# Altium PCB sensorbox.PcbDoc (part 2 of 2)
Units mil, origin at the board's own origin, x right, y up, seen from the top; angles counter-clockwise.
Board outline 2706 x 4143.13 mil, 2 copper layers (Top Layer, Bottom Layer), stack 61.855 mil thick; 118 components, 125 nets, 651 pads, 573 vias.
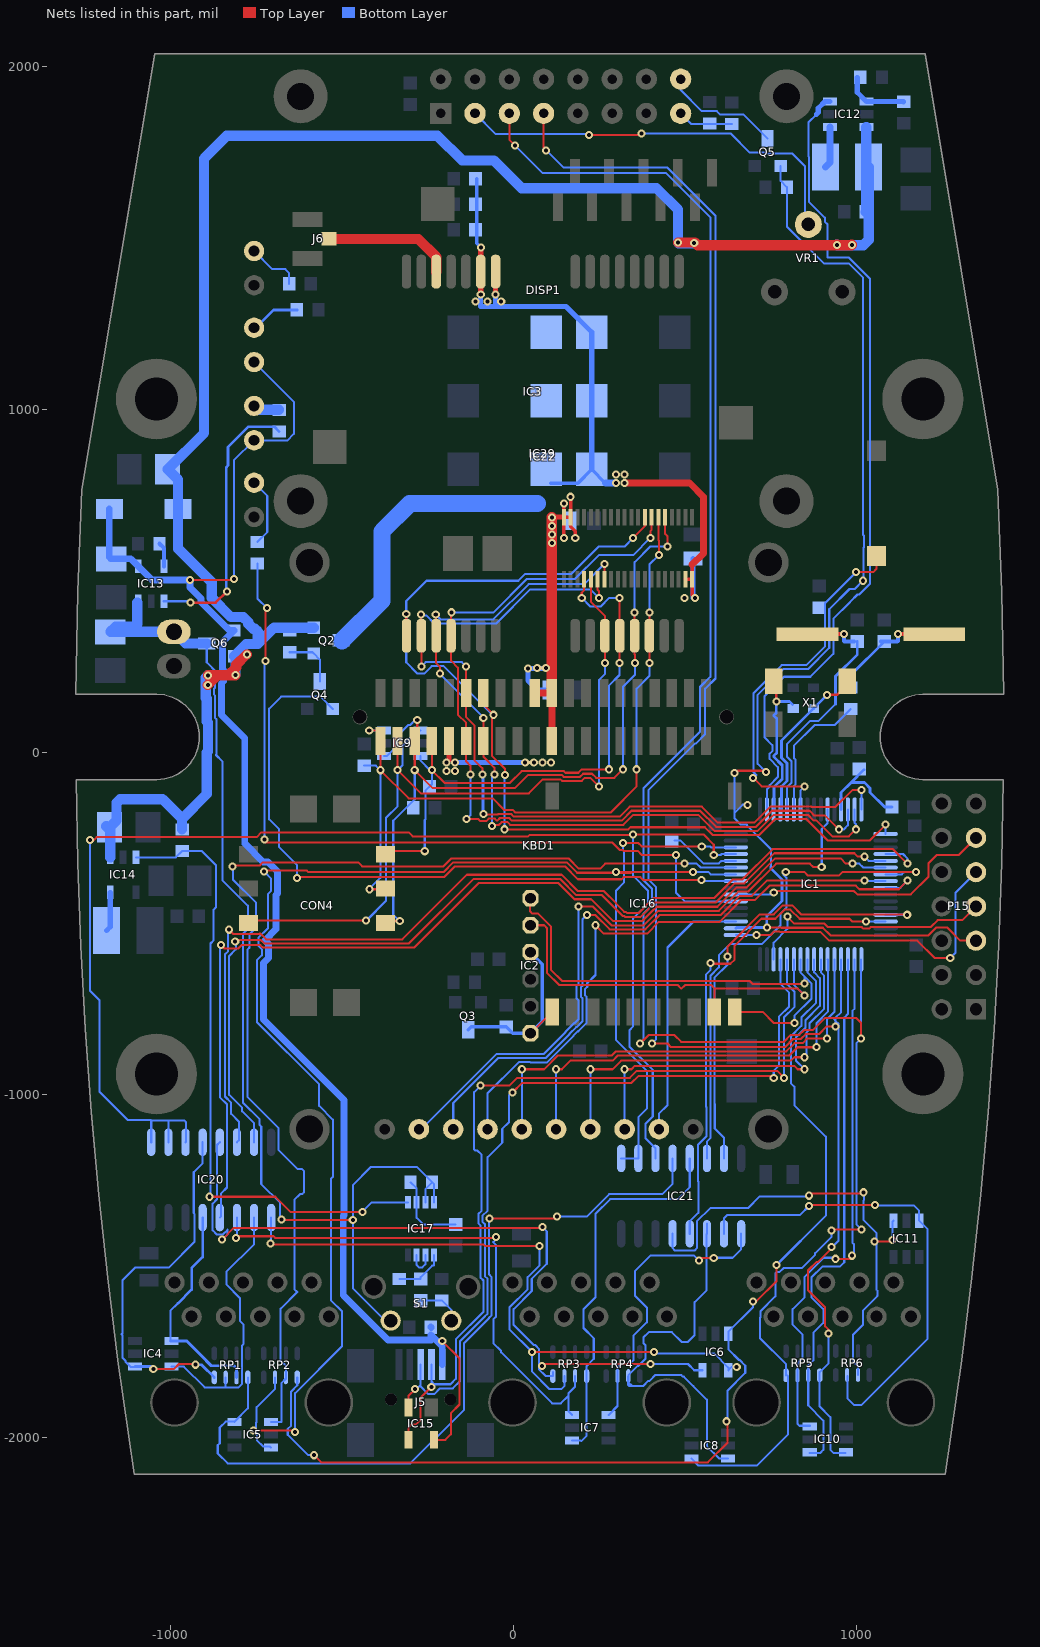
[diagram p2: the nets of this part, all layers, seen from the top]

## Via types
v1: diameter 23.62, hole 11.81, Top Layer to Bottom Layer, tented both sides, 573 vias

## Nets (pads, with @x,y where several pads share a name; then routed paths per layer and width w, separated by ;. In a path a pad name is that pad's centre, name@x,y a point inside that pad or via, vN(x,y) a via of type N, cw(c..) or ccw(c..) an arc to the next point about the centre after c; other vN are vias at no path point) (continued)
GSM_PWR: C12.1 C21.1 C22.1 C23.1 C24.1 C25.2 C26.1 C27.1 C28.1 C29.1 C35.1 C36.1 IC3.1 IC3.2 IC3.39 IC3.40 IC22.10 IC22.19 IC22.21 IC22.22 IC29.24 IC29.25 Q2.3 | length 4479.8
  Top Layer w10: v1(147.99,625) IC3.1@147.99,685.55 ; v1(147.99,725) IC3.1@147.99,685.55 ; v1(167.68,745) IC3.2@167.68,685.55 ; v1@181,619 v1(181,625) 181,644 167.68,657.32 IC3.2@167.68,685.55 ; IC3.39@502.32,504.45 IC3.40@522.01,504.45 ; 522.01,547.01 IC3.40@522.01,504.45 ; v1(530,450) 522.01,457.99 IC3.40@522.01,504.45 ; IC3.1@147.99,685.55 IC3.2@167.68,685.55
  Top Layer w15: v1(-195,-30) -187.32,-22.32 IC22.10@-187.32,32.72 ; v1(-94.72,1335) IC29.25@-94.72,1401.85 v1@-94.72,1472.2 ; v1(-51.42,1335) IC29.24@-51.42,1401.85 ; v1@112.68,685.55 IC3.1@147.99,685.55
  Top Layer w20: IC22.19@62.68,172.48 IC22.21@112.68,172.48 IC22.22@112.68,32.72 ; v1(325,785) 515,785 555,745 555,580 522.01,547.01
  Top Layer w30: IC22.21@112.68,172.48 v1(112.68,610) v1(112.68,635) v1(112.68,660) v1(112.68,685)
  Bottom Layer w10: C29.1@-106.73,1673.23 -106.73,1598.43 -106.73,1523.62 -106.73,1484.69 v1(-94.49,1472.44) ; C12.1@110,785 188.94,785 C23.1@228.94,825 C23.1@268.94,785 ; v1@112.68,685.55 C26.1@164.9,685.55
  Bottom Layer w15: v1(-170,-30) v1(35,-30) ; v1(-94.72,1335) -95,1325 -95,1300 -50,1300 ; v1(-51.42,1335) -51.42,1301.42 -50,1300 ; v1(95,245) 94.09,244.09 v1(43.31,244.09) 43.31,208.66 70.87,181.1 C27.1@106.73,181.1 ; C23.1@228.94,825 C21.1@228.94,1025 C28.1@228.94,1225 153.94,1300 -50,1300 ; v1@525,450 C25.2@525,564.57
  Bottom Layer w20: C23.1@268.94,785 v1(300,785)
  Bottom Layer w50: Q2.3@-499.82,324.84 -382.81,441.85 -382.81,644.19 -302,725 70,725
  other v1: -195,-55 -170,-55 60,-30 85,-30 110,-30 70,245 500,450 300,810 325,810 -110,1315 -75,1315 -35,1315
GSM_PWR_ON: IC1.57 Q4.1 | length 2060
  Top Layer w6: v1(-631,-367) -628,-364 -200.43,-364 -170.11,-333.68 151.28,-333.68 188.41,-370.81 315.97,-370.81 322.35,-364.43 370.72,-364.43 379.29,-373 v1(549,-373)
  Bottom Layer w6: v1(-631,-367) -631,-329 -683,-277 -683,-225 -712,-196 -712,127 -677,162 -562,162 Q4.1@-526,126 ; v1(549,-373) 551.98,-375.98 IC1.57@649.45,-375.98
GSM_UART_CTS: IC1.14 IC3.14 IC22.12 IC29.4 | length 2614
  Top Layer w6: v1(-180,408) -181.34,406.66 IC29.4@-181.34,339.84 -181.34,266.34 -161.28,246.28 -161.28,109.31 -137.32,85.35 IC22.12@-137.32,32.72 -137.32,-27.32 -125,-39.65 v1(-125,-65) ; v1(-136,-195) -101.62,-195 -95.62,-201 -78.38,-201 -71.57,-194.19 -53.38,-194.19 -47.66,-199.91 -46.31,-199.91 -38.59,-192.19 -11.41,-192.19 -3.69,-199.91 316.06,-199.91 344.97,-171 545.03,-171 591.81,-217.78 708.19,-217.78 754.97,-171 864.94,-171 878.94,-185 910,-185 v1(950,-225) ; v1(400,625) 400,645 403.9,648.9 IC3.14@403.9,685.55
  Bottom Layer w6: v1(-180,408) -57,408 40,505 180,505 250,575 350,575 v1(400,625) ; v1(-136,-195) -125,-184 v1(-125,-65) ; v1(950,-225) 965,-225 976.22,-213.78 IC1.14@976.22,-167.32
GSM_UART_RTS: IC1.15 IC3.27 IC22.14 IC29.3 | length 2521.2
  Top Layer w6: v1(-226,401) -224.65,399.65 IC29.3@-224.65,339.84 -224.65,259.65 -213,248 v1(-213,230) ; IC22.14@-90,30.04 IC22.14@-87.32,32.72 ; v1(-87.32,100) IC22.14@-87.32,32.72 ; v1(-62,-215) -64,-213 -62.91,-211.91 -41.34,-211.91 -33.62,-204.19 -16.38,-204.19 -8.66,-211.91 321.03,-211.91 349.94,-183 540.06,-183 586.84,-229.78 713.16,-229.78 759.94,-183 859.97,-183 876.97,-200 885,-200 930.81,-245.81 979.19,-245.81 v1(1000,-225) ; v1(-55,-65) -55,-45 -87.32,-12.68 IC22.14@-87.32,32.72 ; IC3.27@266.1,504.45 v1(266.1,548.9)
  Bottom Layer w6: v1(-226,401) -212.19,387.19 -57.81,387.19 45,490 207.2,490 v1(266.1,548.9) ; v1(-213,230) -213,227 -87.32,101.32 v1(-87.32,100) ; v1(-62,-215) -62,-72 v1(-55,-65) ; IC1.15@995.91,-167.32 995.91,-205.91 1000,-210 v1(1000,-225)
GSM_UART_RX: IC1.16 IC3.26 IC22.11 IC29.2 | length 2731.7
  Top Layer w6: v1(-269,401) -269,340.89 IC29.2@-267.95,339.84 v1(-267.95,250) ; v1(-137.32,250) IC22.11@-137.32,172.48 -137.32,102.32 -113.36,78.36 -113.36,-23.36 -90,-46.72 v1(-90,-65) ; v1(-87,-180.19) -87,-184 -81.4,-184 -79.59,-182.19 -45.56,-182.19 -43.56,-180.19 -6.44,-180.19 1.28,-187.91 311.09,-187.91 340,-159 550,-159 596.78,-205.78 703.22,-205.78 750,-159 869.91,-159 870.91,-160 940,-160 989.41,-110.59 v1(1015.59,-110.59) ; IC3.26@246.42,504.45 246.42,473.58 250,470 v1(250,450)
  Bottom Layer w6: v1(-269,401) -269,399 -253.43,399 -229.62,375.19 -49.81,375.19 50,475 225,475 v1(250,450) ; v1(-267.95,250) -255.14,262.81 -150.13,262.81 v1(-137.32,250) ; v1@-90,-175 v1(-90,-65) -87,-68 v1(-87,-180.19) ; IC1.16@1015.59,-167.32 v1(1015.59,-110.59)
GSM_UART_TX: IC1.17 IC3.13 IC22.13 IC29.1 | length 3036.9
  Top Layer w6: v1(-312,403) -312,340.58 IC29.1@-311.26,339.84 ; IC22.13@-87.32,172.48 -87.32,139.32 v1(-57,109) -61.28,104.72 -61.28,-11.37 -24,-48.65 v1(-24,-67) ; v1(-25,-225) 335.57,-225 341.57,-219 559.09,-219 581.87,-241.78 718.13,-241.78 764.91,-195 855,-195 917.81,-257.81 1040.1,-257.81 v1(1086.46,-211.46) ; v1(350,625) 384.21,659.21 IC3.13@384.21,685.55
  Bottom Layer w6: v1(-57,109) -61,109 -202.81,250.81 -237.71,250.81 -259.33,229.19 -279.19,229.19 -312,262 v1(-312,403) -312,441 -253,500 15,500 35,520 170,520 250,600 325,600 v1(350,625) ; v1(-25,-225) -25,-70 -22,-67 v1(-24,-67) ; IC1.17@1086.46,-238.19 v1(1086.46,-211.46)
I2C1_SCL/USART1_TX_RMP: IC1.58 IC5.3 RP2.7 | length 3688.3
  Top Layer w6: v1(-758,-1979) -641,-1979 v1(-637,-1983) ; v1(-727,-348) -729,-348 -732,-345 -603,-345 -598,-350 -203.4,-350 -175.08,-321.68 156.25,-321.68 186.38,-351.81 344.19,-351.81 346,-350 ; v1(300,-350) 346,-350 ; v1(525,-350) 346,-350
  Bottom Layer w6: v1(-758,-1979) -748,-1979 -748,-2007 -730,-2025 -710.25,-2025 IC5.3@-706.85,-2028.4 ; -746,-1979 -751,-1974 -751,-1957.03 -748.52,-1954.55 -748.52,-1910.52 -694.75,-1856.75 RP2.7@-694.75,-1824 ; v1(-727,-348) -706.19,-368.81 -706.19,-404.62 -715,-413.43 -715,-512.9 -743.5,-541.4 -743.5,-565.07 -733.19,-575.38 -733.19,-592.62 -747.81,-607.24 -747.81,-787.29 -566.1,-969 -566.1,-1031.94 -526.24,-1071.81 -526.24,-1239.31 -531.93,-1245 -531.93,-1598.58 -499.47,-1631.04 -499.47,-1733.47 -636,-1870 -636,-1982 v1(-637,-1983) ; v1(525,-350) 570,-350 576.3,-356.3 IC1.58@649.45,-356.3
I2C1_SDA/USART1_RX_RMP: IC1.59 IC5.1 RP2.6 | length 3324.4
  Top Layer w6: v1(-819,-333) -818,-334 -814.62,-330.62 -739.05,-330.62 -730.11,-321.68 -452.06,-321.68 -440.74,-333 -203.37,-333 -180.05,-309.68 161.22,-309.68 191.35,-339.81 253.62,-339.81 268.43,-325 v1(500,-325)
  Bottom Layer w6: v1(-819,-333) -818,-334 -818,-371.6 -750.19,-439.41 -750.19,-512.22 -769.19,-531.22 -769.19,-569.76 -774.81,-575.38 -774.81,-1006.16 -685,-1095.97 -685,-1160.41 -628.97,-1216.44 -615.94,-1216.44 -610.67,-1221.71 -610.67,-1284.29 -615.94,-1289.56 -621.97,-1289.56 -638.53,-1306.12 -638.53,-1566.47 -630,-1575 -678.25,-1623.25 -678.25,-1774.21 -663.25,-1789.21 RP2.6@-663.25,-1824 ; IC5.1@-706.85,-1953.6 -676.4,-1953.6 -676.4,-1840.8 RP2.6@-662.8,-1827.2 ; v1(500,-325) 535,-325 546.61,-336.61 IC1.59@649.45,-336.61
I2C2_SCL/UART3_TX: IC1.29 IC21.15 | length 1293
  Top Layer w6: v1(625,-596.51) 625,-568.03 719.75,-473.28 760.31,-473.28 786.41,-447.19 813.59,-447.19 839.69,-473.28 1148.28,-473.28 v1(1149.41,-474.41)
  Bottom Layer w6: IC21.15@615,-1185 615,-1125 588,-1098 588,-1026.8 587,-1025.8 587,-658 625,-620 v1(625,-596.51) ; IC1.29@1086.46,-474.41 v1(1149.41,-474.41)
I2C2_SDA/UART3_RX: IC1.30 IC21.4 | length 1432.7
  Top Layer w6: v1(575,-615) 577.33,-617.33 633.62,-617.33 645.81,-605.13 645.81,-564.19 724,-486 764.57,-486 791.38,-459.19 808.62,-459.19 835.43,-486 981,-486 989.09,-494.09 v1(1029.53,-494.09)
  Bottom Layer w6: IC21.4@515,-1405 515,-1369 540,-1344 540,-1252.43 539.19,-1251.62 539.19,-1144.81 564,-1120 564,-1036.74 563,-1035.74 563,-648.06 575,-636.06 v1(575,-615) ; v1(1029.53,-494.09) IC1.30@1086.46,-494.09
IRQ1: IC1.41 IC6.6 RP2.5 | length 3187.2
  Top Layer w6: v1(-581,-2051) -560,-2072 567.94,-2072 625,-2014.94 625,-1949 v1(622,-1952) ; v1(700,-1602) 709.49,-1602 768,-1543.49 v1(768,-1496)
  Bottom Layer w6: RP2.5@-630,-1824 -630,-1847.03 -648,-1865.03 -648,-1964.57 -657.81,-1974.38 -657.81,-1991.62 -598.43,-2051 v1(-581,-2051) ; v1(622,-1952) 625,-1949 625,-1862.43 676.92,-1810.51 676.92,-1789.49 660.62,-1773.19 658.62,-1773.19 627.4,-1741.97 IC6.6@627.4,-1696.85 627.4,-1691.17 700,-1618.57 v1(700,-1602) ; v1(768,-1496) 912,-1352 912,-1122.03 820,-1030.03 820,-976 810.81,-966.81 810.81,-885.81 810,-885 810,-829.43 840.81,-798.62 840.81,-774.19 882.81,-732.19 882.81,-667.17 858.11,-642.47 IC1.41@858.11,-604.33
KB_COL_0: IC1.38 KBD1.6 | length 1232.3
  Top Layer w6: v1(125,-925) 141.93,-925 166.93,-900 290,-900 305,-885 805,-885 829.19,-860.81 884.19,-860.81 v1(885,-860)
  Bottom Layer w6: KBD1.6@125,-1100 v1(125,-925) ; v1(885,-860) 885,-790 918.81,-756.19 918.81,-605.98 IC1.38@917.17,-604.33
KB_COL_1: IC1.39 KBD1.7 | length 1127.6
  Top Layer w6: v1(225,-925) 290,-925 315,-900 810,-900 820,-890 v1(850,-890)
  Bottom Layer w6: KBD1.7@225,-1100 v1(225,-925) ; v1(850,-890) 856,-884 856,-817.37 864.81,-808.56 864.81,-790.19 906.81,-748.19 906.81,-651.81 897.48,-642.48 IC1.39@897.48,-604.33
KB_COL_2: IC1.40 KBD1.8 | length 1077.1
  Top Layer w6: v1(325,-925) 345,-925 355,-915 820,-915 830,-925 v1(850,-925)
  Bottom Layer w6: KBD1.8@325,-1100 v1(325,-925) ; KBD1.8@328.74,-1102.36 KBD1.8@330,-1101.1 ; v1(850,-925) 825,-900 825,-831.4 852.81,-803.59 852.81,-782.19 894.81,-740.19 894.81,-659.57 877.8,-642.55 IC1.40@877.8,-604.33
KB_COL_3: IC1.51 KBD1.9 | length 771.2
  Bottom Layer w6: KBD1.9@425,-1100 425,-1055 450,-1030 450,-570 525.91,-494.09 IC1.51@649.45,-494.09
KB_ROW_0: IC1.11 KBD1.2 | length 1918.8
  Top Layer w6: v1(190,-450) 231.4,-450 286.6,-505.2 380.66,-505.2 422.86,-463 600.12,-463 656.12,-407 684.97,-407 766.97,-325 865,-325 875,-335 v1(900,-335)
  Bottom Layer w6: KBD1.2@-275,-1100 -268.4,-1100 -48.59,-880.19 89.81,-880.19 152.19,-817.81 152.19,-816.44 178.44,-790.19 179.81,-790.19 190,-780 190,-723.37 185.19,-718.56 185.19,-681.44 190,-676.63 v1(190,-450) ; v1(900,-335) 900,-223.94 917.17,-206.78 IC1.11@917.17,-167.32
KB_ROW_1: IC1.24 KBD1.3 | length 1820.2
  Top Layer w6: v1(215,-475) 239.43,-475 281.63,-517.2 385.63,-517.2 427.83,-475 605.09,-475 661.09,-419 696,-419 740,-375 v1(1025,-375)
  Bottom Layer w6: KBD1.3@-175,-1100 -175,-1023.57 -43.62,-892.19 94.78,-892.19 164.19,-822.78 164.19,-821.41 183.41,-802.19 184.78,-802.19 202,-784.97 202,-718.4 197.19,-713.59 197.19,-686.41 202,-681.6 202,-488 v1(215,-475) ; v1@1025,-375.98 IC1.24@1086.46,-375.98
KB_ROW_2: IC1.25 KBD1.4 | length 1843.6
  Top Layer w6: v1(240,-505) 264.2,-529.2 390.6,-529.2 424.8,-495 602.06,-495 666.06,-431 705.97,-431 747.78,-389.19 999.19,-389.19 1010,-400 1125,-400 v1(1150,-375)
  Bottom Layer w6: KBD1.4@-75,-1100 -75,-995.57 16.38,-904.19 49.19,-904.19 ; 50,-905 98.94,-905 176.19,-827.75 176.19,-826.38 188.38,-814.19 189.75,-814.19 214,-789.94 214,-713.43 209.19,-708.62 209.19,-691.38 215.97,-684.59 215.97,-674.03 240,-650 v1(240,-505) ; IC1.25@1086.46,-395.67 1129.33,-395.67 v1(1150,-375)
KB_ROW_3: IC1.37 KBD1.5 | length 1342
  Top Layer w6: v1(25,-925) 90,-925 130,-885 288,-885 300,-873 797,-873 821.19,-848.81 844.36,-848.81 858.17,-835 v1(915,-835)
  Bottom Layer w6: KBD1.5@25,-1100 v1(25,-925) ; v1(915,-835) 915,-780 936.85,-758.15 IC1.37@936.85,-604.33
MUX_CTRL0: IC1.61 IC20.9 IC20.10 IC20.11 IC21.11 | length 4206.8
  Top Layer w6: v1(-1235,-256) -1229,-262 -1215,-248 -748.43,-248 -734.62,-234.19 -305.21,-234.19 -293.59,-245.81 43.39,-245.81 47,-242.2 341.04,-242.2 343.24,-240 v1(350,-240) 555,-240 585,-270 v1(585,-300)
  Bottom Layer w6: v1(-1235,-256) -1234.62,-256.38 -1234.62,-696.38 -1207,-724 -1207,-991 -1125,-1073 -1057,-1073 -1056,-1074 ; IC20.9@-1056,-1138 -1056,-1074 ; IC20.10@-1006,-1138 -1006,-1077 -1003,-1074 ; IC20.11@-956,-1138 -955,-1137 -955,-1079 -960,-1074 -1003,-1074 ; v1(350,-240) 350,-360.68 392.92,-403.6 392.92,-442.03 350,-484.95 350,-800 339.19,-810.81 339.19,-859.19 407,-927 407,-1062.84 386,-1083.85 386,-1126 415,-1155 IC21.11@415,-1185 ; v1(585,-300) 605,-300 607.76,-297.24 IC1.61@649.45,-297.24 ; -1056,-1074 -1003,-1074
MUX_CTRL1: IC1.62 IC21.9 IC21.10 | length 1362.9
  Top Layer w6: v1(320,-265) 365,-265 375,-275 v1(550,-275)
  Bottom Layer w6: IC21.9@315,-1185 IC21.10@365,-1185 365,-1065 390,-1040 390,-930 300.15,-840.15 300.15,-403.6 323,-380.75 323,-288 320,-285 v1(320,-265) ; v1(550,-275) 575,-275 577.56,-277.56 IC1.62@649.45,-277.56
NetC1_1: C1.1 IC1.7 SW1.2 | length 1106.7
  Top Layer w6: v1(700,-75) 725,-100 v1(850,-100) ; v1(1000,525) 1050,525 1059.45,534.45 SW1.2@1059.45,572.24
  Bottom Layer w6: v1(700,-75) 709,-66 701,-58 701,171.97 783.03,254 855.03,254 910,308.97 910,435 v1(1000,525) ; IC1.7@838.43,-167.32 838.43,-111.57 v1(850,-100)
NetC2_1: C2.1 IC1.5 Q1.2 | length 756.5
  Top Layer w12: Q1.2@858.31,344.49 v1(964.57,344.49)
  Bottom Layer w6: IC1.5@799.06,-167.32 799.06,-101.74 811.81,-88.99 811.81,-27.01 799.06,-14.26 799.06,24.06 866.17,91.17 891.17,91.17 940,140
  Bottom Layer w8: 940,140 940,221.5 1003.94,285.43 C2.1@1003.94,322.83
  Bottom Layer w12: v1(964.57,344.49) 964.57,324.8 966.54,322.83 C2.1@994.09,322.83
NetC3_1: C3.1 Q1.1 R1.1 | length 350.6
  Top Layer w12: v1(1122.05,344.49) 1131.78,344.49 Q1.1@1228.31,344.49
  Bottom Layer w8: R1.1@984.25,188.98 984.25,224.41 C3.1@1082.68,322.83
  Bottom Layer w12: C3.1@1072.83,322.83 C3.1@1082.68,322.83 1120.08,322.83 1122.05,324.8 v1(1122.05,344.49)
NetC33_1: C33.1 IC1.4 X1.1 | length 485
  Top Layer w8: v1(915.35,166.34) 916.34,167.32 944.88,167.32 974.88,197.32 X1.1@974.88,206.69
  Bottom Layer w8: IC1.4@779.37,-167.32 782.81,-163.88 782.81,-99.6 798.81,-83.6 798.81,-32.4 782.81,-16.4 782.81,33.8 C33.1@875.98,126.97 v1(915.35,166.34)
NetC34_1: C34.1 IC1.3 X1.2 | length 458.8
  Top Layer w8: X1.2@759.88,206.69 767.72,198.86 v1(767.72,147.64)
  Bottom Layer w8: IC1.3@759.68,-167.32 761,-166.01 761,-101.61 784.81,-77.8 784.81,-38.2 761,-14.39 761,-10 768.81,-2.19 768.81,97.84 759.68,106.97 767.72,115 v1(767.72,147.64) 806.1,147.64 C34.1@815,138.74
NetC38_1: C38.1 FB1.2 IC1.13 | length 299.5
  Bottom Layer w8: IC1.13@956.54,-167.32 956.54,-118.27 986.02,-88.78 ; FB1.2@1023.62,-51.18 986.02,-88.78 ; C38.1@1105.12,-160 1083.88,-160 1041.18,-117.3 1041.18,-105.34 1024.62,-88.78 986.02,-88.78
NetC39_1: C39.1 IC2.1 IC2.4 IC16.1 Q3.3 | length 547.2
  Top Layer w6: IC2.1@50,-820 51.71,-820 IC16.1@114.25,-757.46
  Bottom Layer w10: Q3.3@-131,-810 -122.5,-801.5 C39.1@-20,-801.5 -1.5,-820 IC2.1@50,-820 84.62,-785.38 84.62,-618.4 IC2.4@50,-583.78
NetC41_1: C41.1 R42.1 S1.1 | length 132.1
  Bottom Layer w6: C41.1@-270,-1599.5 R42.1@-208,-1599.5 -180.42,-1627.08 S1.1@-180.42,-1658.21
NetC41_2: C41.2 IC17.1 R8.2 | length 151
  Bottom Layer w6: R8.2@-332,-1536.5 C41.2@-270,-1536.5 -270,-1531.4 -236.38,-1497.79 -231.28,-1497.79 -230.61,-1497.12 IC17.1@-230.61,-1466.77
NetC42_2: C42.2 IC17.6 R11.2 | length 232.3
  Bottom Layer w6: R11.2@-299.5,-1255 -281.8,-1272.7 IC17.6@-281.8,-1313.23 -281.8,-1358.2 -262.5,-1377.5 C42.2@-168,-1377.5
NetDISP1_3: DISP1.3 VR1.2 | length 1204.6
  Top Layer w6: v1(221,1800) 369,1800 v1(374,1805)
  Bottom Layer w6: DISP1.3@-111.42,1863.39 -50.84,1802.81 218.19,1802.81 v1(221,1800) ; v1(374,1805) 634,1805 690,1749 737,1749 740,1746 814.64,1746 850.64,1710 850.64,1549.79 VR1.2@861,1539.43
NetDISP1_15: DISP1.15 R13.1 R14.1 | length 162.2
  Bottom Layer w6: DISP1.15@488.58,1863.39 519.46,1832.5 R14.1@638,1832.5
NetDISP1_16: DISP1.16 Q5.3 | length 343.7
  Bottom Layer w6: DISP1.16@488.58,1963.39 488.58,1931.78 550.59,1869.78 594.22,1869.78 604,1860 672,1860 Q5.3@742,1790
NetIC1_2: IC1.2 IC12.3 | length 2422
  Bottom Layer w6: IC1.2@740,-167.32 740,-109.01 748,-101.01 748,-96.23 771.81,-72.42 771.81,-43.58 748,-19.77 748,-4.62 755.81,3.19 755.81,20.43 733,43.24 733,163 790,220 867,220 934,287 934,389 983,438 983,438.43 1004.38,459.81 1009.24,459.81 1040.81,491.38 1040.81,1381.16 978.97,1443 917,1443 917,1539.37 909.37,1547 909.37,1559.46 862.64,1606.19 862.64,1736.33 861,1737.97 861,1837 885,1861
  Bottom Layer w15: 885,1861 889.68,1865.68 889.68,1878.4 909.68,1898.4 IC12.3@923.85,1898.4
NetIC1_6: IC1.6 R1.2 | length 400
  Bottom Layer w6: IC1.6@818.74,-167.32 818.74,-99.03 823.81,-93.96 823.81,-22.04 818.74,-16.97 818.74,18.38 879.53,79.17 937.44,79.17 R1.2@984.25,125.98
NetIC1_54: IC1.54 R12.1 | length 2337.8
  Top Layer w6: v1(-726,-255) -726,-260 -722,-264 289.57,-264 311.38,-285.81 319.62,-285.81 322,-288.19 363.19,-288.19 375,-300 v1(475,-300) ; v1(-723,266) -723,415 v1(-718,420)
  Bottom Layer w6: R12.1@-746,550.5 -746,448 v1(-718,420) ; v1(-726,-255) -726,263 v1(-723,266) ; v1(475,-300) 475,-410 500.04,-435.04 IC1.54@649.45,-435.04
NetIC1_60: IC1.60 R2.1 | length 210.4
  Bottom Layer w6: R2.1@470,-257.5 487.5,-257.5 554.61,-324.61 600,-324.61 607.69,-316.93 IC1.60@649.45,-316.93
NetIC12_1: IC12.1 L2.2 | length 121.9
  Bottom Layer w20: L2.2@911.01,1707 923.85,1719.84 IC12.1@923.85,1823.6
NetIC12_4: IC12.4 R6.1 R7.2 | length 189.9
  Bottom Layer w15: R7.2@1003.5,1968 1003.5,1925.06 IC12.4@1030.15,1898.4 1138.09,1898.4 R6.1@1139,1897.5
NetIC13_1: IC13.1 R5.2 | length 802
  Top Layer w8: v1(-942,436) -868,436 v1(-835,469)
  Bottom Layer w8: IC13.1@-1018.5,440 -946,440 v1(-942,436) ; v1(-835,469) -836.81,470.81 -836.81,831.19 -832,836 -832,889.9 -772.37,949.53 -697.02,949.53 R5.2@-683,935.5
NetIC13_5: IC13.5 R3.2 | length 71.4
  Bottom Layer w12: R3.2@-1031.5,608 -1018.5,595 IC13.5@-1018.5,542
NetIC14_3: IC14.3 IC17.5 R17.1 | length 1841.3
  Top Layer w6: v1(-886,-1297) -694,-1297 -650,-1341 v1(-440,-1341)
  Bottom Layer w6: IC14.3@-1100.5,-307 -984.5,-307 R17.1@-966,-288.5 -908.96,-288.5 -867,-330.46 -867,-452.57 -873.81,-459.38 -873.81,-549 -883,-558.19 -883,-1294 v1(-886,-1297) ; v1(-440,-1341) -412.23,-1313.23 IC17.5@-307.39,-1313.23
NetIC14_5: IC14.5 L1.1 | length 115.3
  Bottom Layer w15: L1.1@-1185.99,-520 -1175.5,-509.51 IC14.5@-1175.5,-409
NetIC17_2: IC17.2 IC17.3 | length 88.9
  Bottom Layer w6: IC17.3@-281.8,-1466.77 -281.8,-1496.2 -275,-1503 -265,-1503 -256.2,-1494.2 IC17.2@-256.2,-1466.77
NetIC29_28: IC29.28 J6.1 | length 377
  Top Layer w30: J6.1@-537.01,1497.09 -276.96,1497.09 -224.65,1444.78 IC29.28@-224.65,1401.85
NetLED1_K: LED1.K R5.1 | length 77.8
  Bottom Layer w30: LED1.K@-756,1010 -744.5,998.5 R5.1@-683,998.5
NetLED2_K: LED2.K R16.1 | length 160.7
  Bottom Layer w6: LED2.K@-756,1462 -703,1409 -665,1409 -653.5,1397.5 R16.1@-653.5,1366
NetQ2_1: Q2.1 Q4.3 R10.1 | length 160.9
  Bottom Layer w6: R10.1@-652,291.5 -585.5,291.5 Q2.1@-582,288 -564,270 Q4.3@-564,206
NetR12_2: R12.2 USR.A | length 200.3
  Bottom Layer w6: USR.A@-756,786 -717.47,747.47 -717.47,642.02 R12.2@-746,613.5
NetR41_1: R41.1 USB.K | length 144
  Bottom Layer w8: USB.K@-752,1237 -699,1290 R41.1@-630,1290
RJ1_SPI1_MISO/ADC_CH7: IC4.1 IC20.5 RP1.6 | length 671.1
  Bottom Layer w6: IC4.1@-1000,-1717.6 -1000,-1630 -978,-1608
  Bottom Layer w8: IC4.1@-1000,-1717.6 IC4.1@-996.85,-1717.6 -952.4,-1717.6 -880,-1790 ; -978,-1608 -938,-1568 -938,-1505 -906,-1473 IC20.5@-906,-1358 ; -895,-1777 -882,-1790 -880,-1790 ; RP1.6@-807.25,-1824 -807.25,-1797.75 -815,-1790 -880,-1790
RJ1_SPI1_MOSI/ADC_CH8: IC5.6 IC21.12 RP1.5 | length 2315.9
  Top Layer w6: v1(-69,-1361) 120,-1361 121,-1362 v1(128,-1355)
  Bottom Layer w6: RP1.5@-774,-1824 -774,-1914.45 IC5.6@-813.15,-1953.6 -813.75,-1953 -839,-1953 -856.19,-1970.19 -856.19,-2016.19 -862,-2022 -862,-2046 -833,-2075 -300,-2075 -143.17,-1918.17 -143.17,-1723.64 -70.56,-1651.03 -70.56,-1650.5 -62.77,-1642.71 -62.77,-1531.44 -70.56,-1523.65 -70.56,-1423.87 -70.81,-1423.62 -70.81,-1362.81 v1(-69,-1361) ; v1(128,-1355) 214.33,-1355 279.83,-1289.5 434.5,-1289.5 465,-1259 IC21.12@465,-1185
RJ1_SPI1_NSS/ADC_CH5: IC4.4 IC20.12 RP1.8 | length 1102.1
  Top Layer w6: v1(-1050,-1800) -990,-1800 -975,-1785 v1@-925,-1785
  Top Layer w8: v1(-927,-1787) v1@-925,-1785
  Bottom Layer w6: IC4.4@-1099,-1794 -1115,-1794 -1131.07,-1777.93 -1131.07,-1775.17 -1139.68,-1766.57 -1139.68,-1700.8 -1142.74,-1697.74 -1139.81,-1694.81 -1139.81,-1540.81 -1102,-1503 -1059,-1503 -1058,-1504 -1005,-1504 -930,-1429 -930,-1347 -932,-1345 -932,-1225 -906,-1199 IC20.12@-906,-1138
  Bottom Layer w8: IC4.4@-1103.15,-1792.4 -1057.6,-1792.4 v1(-1050,-1800) ; v1(-927,-1787) -909,-1787 RP1.8@-872,-1824
RJ1_SPI1_SCK/ADC_CH6: IC4.3 IC20.2 RP1.7 | length 806.3
  Bottom Layer w6: IC4.3@-996.85,-1792.4 -960.6,-1792.4 -900,-1853 -842,-1853 ; RP1.7@-838.75,-1824 -838.75,-1849.75 -842,-1853 ; IC20.2@-756,-1358 -756,-1435 -837,-1516 -837,-1552.49 -797.19,-1592.3 -797.19,-1659.27 -787,-1669.46 -787,-1727 -791,-1731 -791,-1842.96 -801.04,-1853 -842,-1853
RJ2_I2C2_SCL/UART3_TX: IC7.1 IC21.1 RP4.7 | length 888.2
  Top Layer w6: v1(542,-1483) 549,-1476 v1(585,-1476)
  Bottom Layer w6: IC7.1@278.15,-1933.6 304.25,-1907.5 RP4.7@304.25,-1820 304.25,-1795.75 315,-1785 340,-1785 350.75,-1774.25 350.75,-1702.88 390,-1663.63 390,-1620 355,-1585 355,-1514 400,-1469 528,-1469 v1(542,-1483) ; v1(585,-1476) 586,-1475 640,-1475 665,-1450 IC21.1@665,-1405
RJ2_I2C2_SDA/UART3_RX: IC8.6 IC21.3 RP4.6 | length 1197.4
  Bottom Layer w6: RP4.6@335,-1822 335,-1846 338,-1849 347,-1849 ; 526,-1849 525.5,-1849.5 ; IC21.3@565,-1375 IC21.3@565,-1405 564.19,-1405.81 564.19,-1569.19 529.19,-1604.19 529.19,-1700.24 508.62,-1720.81 491.38,-1720.81 462.57,-1692 395.57,-1692 380.19,-1707.38 380.19,-1724.62 386,-1730.43 386,-1769.04 364.04,-1791 361.96,-1791 335.75,-1817.21 RP4.6@335.75,-1820 335.75,-1837.75 347,-1849 ; IC8.6@626.15,-2060.4 600.4,-2060.4 565,-2025 565,-1889 525.5,-1849.5 ; 347,-1849 379,-1849 394,-1834 398.05,-1834 414.92,-1817.13 490.16,-1817.13 495.03,-1822 498,-1822 525.5,-1849.5
RJ2_SPI1_MISO/ADC_CH7: IC7.6 IC20.3 RP3.6 | length 1582.2
  Top Layer w6: v1(-809,-1417) -804.19,-1412.19 -699.38,-1412.19 -694.57,-1417 -52,-1417 v1(-50,-1415)
  Bottom Layer w6: v1(-809,-1417) -806,-1414 IC20.3@-806,-1358 ; v1(-50,-1415) -47,-1418 -58.56,-1429.56 -50.77,-1437.35 -50.77,-1647.68 -57.81,-1654.72 -57.81,-1724.16 -35,-1746.97 -35,-1751.05 113.76,-1899.81 138.62,-1899.81 161.18,-1877.25 161.18,-1870 ; IC7.6@171.85,-1933.6 161.18,-1922.93 161.18,-1870 ; RP3.6@180.75,-1820 180.75,-1850.43 161.18,-1870
RJ2_SPI1_MOSI/ADC_CH8: IC7.4 IC21.13 RP3.5 | length 1123.4
  Bottom Layer w6: IC7.4@171.85,-2008.4 196.4,-2008.4 198,-2010 214,-1994 RP3.5@214,-1820 214,-1791 235,-1770 235,-1710 205,-1680 205,-1625 240,-1590 240,-1347 283,-1304 480,-1304 515,-1269 IC21.13@515,-1185
RJ2_SPI1_NSS/ADC_CH5: IC6.3 IC20.13 RP3.8 | length 2351.6
  Top Layer w6: v1(-849,-1422) -815,-1388 82,-1388 v1(85,-1385) ; v1(84,-1791) 90,-1785 v1(400,-1785)
  Bottom Layer w6: IC20.13@-856,-1138 -864,-1146 -864,-1304.43 -877,-1317.43 -877,-1394.7 -864.7,-1407 -847.3,-1407 -833,-1392.7 -833,-1406 v1(-849,-1422) ; v1(84,-1791) 75,-1800 ; v1(85,-1385) 97.81,-1397.81 97.81,-1492.7 54,-1536.51 54,-1571.97 1,-1624.97 1,-1671 59.19,-1729.19 63.62,-1729.19 75.81,-1741.38 75.81,-1799.19 75,-1800 ; RP3.8@116,-1809 RP3.8@116,-1820 95,-1820 75,-1800 ; v1(400,-1785) 510,-1785 528.15,-1803.15 IC6.3@552.6,-1803.15
RJ2_SPI1_SCK/ADC_CH6: IC6.1 IC20.1 RP3.7 | length 2069.9
  Top Layer w6: v1(-708,-1433) -705.19,-1435.81 -87,-1435.81 -81.81,-1441 v1(77,-1441) ; v1(55,-1750) 410.77,-1750 v1(411.15,-1749.62)
  Bottom Layer w6: v1(-708,-1433) -706,-1431 IC20.1@-706,-1358 ; v1(77,-1441) 77,-1496.54 42,-1531.54 42,-1567 -11,-1620 -11,-1684 v1(55,-1750) 55,-1807.11 105.89,-1858 140.5,-1858 149.25,-1849.25 RP3.7@149.25,-1820 ; v1(411.15,-1749.62) 415.53,-1754 586.06,-1754 627.4,-1795.34 IC6.1@627.4,-1803.15 636.55,-1794 v1(652,-1794)
RJ3_I2C2_SCL/UART3_TX: IC11.6 IC21.2 RP6.7 | length 1408.2
  Top Layer w6: v1(863,-1324) 866,-1321 v1(1055,-1321)
  Bottom Layer w6: IC21.2@615,-1405 615,-1360 625,-1350 837,-1350 v1(863,-1324) ; RP6.7@975,-1820 975,-1885 995,-1905 1015,-1905 1209,-1711 1209,-1391.45 IC11.6@1184.4,-1366.85 1184.4,-1338.4 1168,-1322 1056,-1322 v1(1055,-1321)
RJ3_I2C2_SDA/UART3_RX: IC11.4 IC21.5 RP6.6 | length 1430.4
  Top Layer w6: v1(863,-1294) 869,-1288 v1@1029,-1288 ; v1(1054,-1427) 1103,-1427 v1(1107,-1423)
  Bottom Layer w6: IC21.5@465,-1405 465,-1447 472,-1454 529,-1454 536,-1447 536,-1369 575,-1330 685,-1330 719,-1296 861,-1296 v1(863,-1294) ; RP6.6@1005.75,-1817 1005.75,-1792 990.75,-1777 990.75,-1700.25 1020,-1671 1020,-1629 1062,-1587 1063,-1587 1063,-1571.46 1059.47,-1567.93 v1@1059.47,-1432.47 ; v1(1022,-1284) 1023,-1285 1023,-1306.6 1022.19,-1307.41 1022.19,-1365.19 1059.47,-1402.47 v1@1059.47,-1432.47 ; v1(1054,-1427) v1@1059.47,-1432.47 ; v1(1107,-1423) 1107,-1369.45 IC11.4@1109.6,-1366.85
SIM_CLK: C16.1 CON4.C3 IC3.16 IC9.4 IC22.6 IC29.12 | length 2314.5
  Top Layer w6: CON4.C3@-372,-498 -367,-493 v1(-331,-493) ; v1(-280,94) -280,40.04 IC22.6@-287.32,32.72 v1(-287.32,-52.68) -235,-105 5,-105 42.83,-67.17 142.64,-67.17 147.47,-72 194.97,-72 203.97,-63 229.97,-63 241.97,-75 295,-75 v1(320,-50) ; v1(354.09,407.05) IC29.12@354.09,339.84 354.09,285 355,284.09 v1(355,260) ; IC3.16@443.27,685.55 443.27,636.73 450,630 v1(450,600)
  Bottom Layer w6: IC9.4@-377.15,-11.4 -369.34,-11.4 -335,22.94 -335,50 -305.81,79.19 -300.27,79.19 -285.46,94 v1(-280,94) ; v1(-331,-493) -350,-474 -350,-200 -287.32,-137.32 v1(-287.32,-52.68) ; v1(320,-50) 320,190 355,225 v1(355,260) ; v1@354.09,404.09 v1(354.09,407.05) 354.09,554.09 400,600 v1(450,600)
SIM_DATA: CON4.C6 IC3.25 IC9.1 IC22.4 IC29.10 | length 2335.4
  Top Layer w6: CON4.C6@-772,-498 -765,-491 v1(-429,-491) ; IC22.4@-337.32,32.72 v1(-337.32,-52.32) -269.65,-120 45.54,-120 86.37,-79.17 137.66,-79.17 142.5,-84 199.94,-84 208.94,-75 225,-75 v1(250,-100) ; IC3.25@226.73,504.45 226.73,438.27 267.48,397.52 IC29.10@267.48,339.84 v1(267.48,260)
  Bottom Layer w6: v1(-429,-491) -428,-491 -371,-434 -371,-191 -337.32,-157.32 v1(-337.32,-52.32) -323,-38 -323,19.06 -278.66,63.4 IC9.1@-270.85,63.4 ; v1(250,-100) 250,210 267.48,227.48 v1(267.48,260) v1@267.48,262.48
SIM_RST: C15.1 CON4.C2 IC3.15 IC9.6 IC22.2 IC29.13 | length 2292.7
  Top Layer w6: v1(-420,63) -394,63 -387.32,56.32 IC22.2@-387.32,32.72 v1(-387.32,-52.68) -305,-135 -60,-135 -26.81,-168.19 -1.47,-168.19 6.25,-175.91 284.09,-175.91 360,-100 v1(360,-50) ; v1(-419,-400) -374,-400 CON4.C2@-372,-398 ; v1(397.4,407.6) IC29.13@397.4,339.84 397.4,277.6 397.5,277.5 v1(397.5,260) ; IC3.15@423.58,685.55 423.58,618.58 425,617.17 v1(425,575)
  Bottom Layer w6: C15.1@-435,-39.5 -400.5,-39.5 v1(-387.32,-52.68) -387.32,-366.32 -420,-399 v1(-419,-400) ; v1(-420,63) -377.55,63 IC9.6@-377.15,63.4 ; v1(360,-50) 360,185 397.5,222.5 v1(397.5,260) ; v1(397.4,407.6) 397.4,547.4 v1(425,575)
SIM_VCC: C14.1 CON4.C1 IC3.24 IC9.3 IC22.8 IC29.11 | length 1763.9
  Top Layer w6: CON4.C1@-372,-298 -363,-289 v1(-258,-289) ; IC22.8@-237.32,32.72 v1(-237.32,-52.32) -199.65,-90 -10,-90 24.83,-55.17 147.61,-55.17 152.44,-60 190,-60 200,-50 v1(280,-50) ; v1(200,450) 200,465 207.05,472.05 IC3.24@207.05,504.45 ; v1(310,260) IC29.11@310,339.06 ; v1(310,450) IC29.11@310,339.06 ; IC29.11@310.79,339.84 IC29.11@310,339.06
  Bottom Layer w6: IC9.3@-270.85,-11.4 -270.85,-24.15 -242.68,-52.32 v1(-237.32,-52.32) -237.32,-93.83 C14.1@-244.5,-101 -256.2,-112.71 -256.2,-196.2 -258,-198 -258,-287 -256,-289 v1(-258,-289) ; v1(200,450) 225,425 255,425 280,450 v1(310,450) ; v1(280,-50) 280,195 310,225 v1(310,260)
SKM53_RX: IC1.42 IC2.6 IC16.10 | length 1436.7
  Top Layer w6: IC2.6@50,-426.3 58.7,-435 49,-444.7 49,-463.89 56.03,-470.92 72.81,-470.92 110,-508.11 110,-635 142.19,-667.19 689.19,-667.19 698,-676 849,-676 v1(850,-675) ; IC16.10@645.75,-757.46 727.46,-757.46 760,-790 v1(820,-790)
  Bottom Layer w6: v1(820,-790) 820,-769.43 870.81,-718.62 870.81,-675.81 850,-655 ; IC1.42@838.43,-604.33 838.43,-643.43 850,-655 ; v1(850,-675) 850,-655
SKM53_TX: IC1.43 IC2.5 IC16.9 | length 1156.6
  Top Layer w6: IC2.5@50,-505.04 89.96,-505.04 98,-513.08 98,-643 134.19,-679.19 479.76,-679.19 490.57,-690 501.38,-679.19 577.19,-679.19 588,-690 ; IC16.9@586.69,-757.46 586.69,-691.31 588,-690 ; v1(850,-710) 830,-690 588,-690
  Bottom Layer w6: IC1.43@818.74,-604.33 818.74,-678.74 v1(850,-710)
SPI1_MISO/ADC_CH7: IC1.22 IC20.4 | length 2979.5
  Top Layer w6: v1(-853,-562) -842.19,-572.81 -802.38,-572.81 -792.57,-563 -737.94,-563 -730.94,-570 -289,-570 -100.68,-381.68 131.39,-381.68 178.91,-429.19 227.56,-429.19 291.57,-493.2 375.69,-493.2 417.89,-451 595.15,-451 651.15,-395 680,-395 765,-310 955,-310 970,-325 v1(990,-325)
  Bottom Layer w6: IC20.4@-856,-1358 -852,-1354 -852,-1287 -835,-1270 -835,-1027.25 -856,-1006.25 -856,-567 -851,-562 v1(-853,-562) ; v1(990,-325) 1010,-325 1021.61,-336.61 IC1.22@1086.46,-336.61
SPI1_MOSI/ADC_CH8: IC1.23 IC21.14 | length 1472.4
  Top Layer w6: v1(795,-350) 850,-350 860,-360 950,-360 960,-350 v1(1175,-350)
  Bottom Layer w6: IC21.14@565,-1185 565,-1135.97 576,-1124.97 576,-1031.77 575,-1030.77 575,-653.03 600,-628.03 600,-592.08 632.19,-559.9 725,-559.9 779.19,-505.71 779.19,-471.38 797,-453.57 797,-366 788,-357 v1(795,-350) ; IC1.23@1086.46,-356.3 1133.7,-356.3 1140,-350 v1(1175,-350)
SPI1_NSS/ADC_CH5: IC1.20 IC20.14 | length 2939.8
  Top Layer w6: v1(-829,-518) -816.38,-530.62 -740.71,-530.62 -738.55,-528.45 -721,-546 -323.57,-546 -135.25,-357.68 141.33,-357.68 188.85,-405.19 264.13,-405.19 300.15,-441.21 300.15,-442.03 323.79,-465.67 328.78,-465.67 332.31,-469.2 365.75,-469.2 409.95,-425 587.21,-425 641.21,-371 669,-371 757,-283 1108.07,-283 v1(1150.07,-325)
  Bottom Layer w6: v1(-829,-518) -831.81,-520.81 -831.81,-580.81 -840.81,-589.81 -840.81,-1004.46 -823,-1022.28 -823,-1055 -800,-1078 -800,-1132 IC20.14@-806,-1138 ; IC1.20@1086.46,-297.24 1137.24,-297.24 1150.07,-310.07 v1(1150.07,-325)
SPI1_SCK/ADC_CH6: IC1.21 IC20.15 | length 2789.9
  Top Layer w6: v1(-811,-552) -811,-550 -809,-548 -735.97,-548 -725.97,-558 -304,-558 -115.68,-369.68 136.36,-369.68 183.88,-417.19 258.34,-417.19 288.15,-447 ; 259.16,-417.19 288.15,-446.18 288.15,-447 ; v1(1025,-305) 1005,-305 995,-295 761.97,-295 673.97,-383 646.18,-383 590.18,-439 412.92,-439 370.72,-481.2 327.34,-481.2 323.81,-477.67 318.82,-477.67 288.15,-447
  Bottom Layer w6: v1(-811,-552) -811,-550 -809,-548 -809,-574.97 -828.81,-594.78 -828.81,-999.49 -791,-1037.3 -791,-1048 -756,-1083 IC20.15@-756,-1138 ; v1(1025,-305) 1036.93,-316.93 IC1.21@1086.46,-316.93
SPI2_MISO: IC1.35 IC10.4 RP5.6 | length 1600
  Bottom Layer w6: IC10.4@865,-2045 895,-2045 905,-2035 905,-1950 860.75,-1905.75 RP5.6@860.75,-1818 860.75,-1789.25 875.75,-1774.25 875.75,-1693.85 905,-1664.6 905,-1625 870,-1590 870,-1532.51 902.51,-1500 953.75,-1500 965.75,-1488 965.75,-774.25 976.22,-763.78 IC1.35@976.22,-604.33
SPI2_MOSI/DISP_D0: DISP1.7 IC1.36 IC10.3 RP5.5 | length 5366.7
  Top Layer w6: DISP1.7@88.58,1863.39 88.58,1762.42 v1(96,1755) ; v1(405,-850) 450,-850 460,-860 793.03,-860 816.22,-836.81 839.39,-836.81 853.39,-822.81 892.19,-822.81 915,-800 v1(940,-800) ; v1(920,-1696) 920,-1685 910,-1675 910,-1620 860,-1570 860,-1512 885.19,-1486.81 889.62,-1486.81 928,-1448.43 v1(928,-1444)
  Bottom Layer w6: v1(96,1755) 98,1755 148,1705 450,1705 590,1565 590,215 560,185 560,53.03 531.97,25 530,25 395,-110 395,-371.74 416.92,-393.66 416.92,-838.08 v1(405,-850) ; v1(920,-1696) 920,-1783 894,-1809 RP5.5@894,-1818 894,-1909 925,-1940 925,-2035 935,-2045 IC10.3@970,-2045 ; v1(928,-1444) 930,-1444 948.81,-1425.19 948.81,-791.81 940,-783 ; v1(940,-800) 940,-783 ; IC1.36@956.54,-604.33 956.54,-758.46 940,-775 ; 940,-783 936,-779 940,-775 ; 940,-783 940,-775
SPI2_NSS/DISP_RW: DISP1.5 IC1.33 IC8.1 RP5.8 | length 5987
  Top Layer w6: DISP1.5@-11.42,1863.39 -11.42,1786.42 v1(5,1770) ; v1(370,-850) 395,-825 470,-825 490,-845 790,-845 810.19,-824.81 834.42,-824.81 848.42,-810.81 874.19,-810.81 910,-775 1000,-775 1015,-790 v1(1015,-835.75) ; v1(928,-1395) 931,-1392 v1(1016,-1392)
  Bottom Layer w6: v1(5,1770) 85,1690 445,1690 575,1560 575,220 545,190 545,60 380,-105 380,-373.71 404.92,-398.63 404.92,-447 380,-471.92 380,-840 v1(370,-850) ; IC8.1@519.85,-2060.4 540.66,-2081.21 710.79,-2081.21 801.87,-1990.13 801.87,-1820.87 RP5.8@797,-1816 ; RP5.8@796,-1818 796,-1786 720,-1710 720,-1650 721.47,-1648.53 721.47,-1631.04 765,-1587.51 765,-1520 768.19,-1516.81 776.62,-1516.81 788.43,-1505 842,-1505 881,-1466 881,-1461.57 928,-1414.57 v1(928,-1395) ; IC1.33@1015,-604.92 v1(1015,-835.75) 1001.19,-849.56 1001.19,-1377.19 v1(1016,-1392)
SPI2_SCK: IC1.34 IC10.6 RP5.7 | length 1547.4
  Top Layer w6: v1(940,-1478) 986,-1478 993,-1471 991,-1469 v1(988,-1469)
  Bottom Layer w6: IC10.6@865,-1965 835,-1965 829.25,-1959.25 RP5.7@829.25,-1818 829.25,-1783.21 844.25,-1768.21 844.25,-1699.25 815,-1670 815,-1625 850,-1590 850,-1530.76 905.76,-1475 937,-1475 v1(940,-1478) ; v1(988,-1469) 994,-1463 994,-1435.43 989.19,-1430.62 989.19,-754.72 995.91,-748 IC1.34@995.91,-604.33
SWDCLK: IC1.49 P15.9 | length 942.2
  Top Layer w6: v1(710,-533.46) 750.92,-533.46 760.57,-523.81 777.41,-523.81 777.79,-524.19 896.19,-524.19 922,-550 1179,-550 1229,-600 v1(1275,-600)
  Bottom Layer w6: IC1.49@649.45,-533.46 v1(710,-533.46) ; v1(1275,-600) 1290.47,-584.53 1290.47,-409.53 P15.9@1350,-350
SWDIO: IC1.46 P15.7 | length 732.4
  Top Layer w6: v1(800,-480) 820.19,-500.19 908.16,-500.19 917.97,-510 1016,-510 1020.91,-514.91 1038.15,-514.91 1043.05,-510 1218.54,-510 1238.54,-490 1310,-490 P15.7@1350,-450
  Bottom Layer w6: IC1.46@759.68,-604.33 759.68,-555.88 800,-515.57 v1(800,-480)
TIM2_CH1_ETR/SPI1_NSS: IC1.50 P15.5 Q5.1 R15.2 | length 3517.2
  Top Layer w6: v1(646,-61) 652.81,-54.19 733.19,-54.19 v1(737,-58) ; v1@740,-511.81 782.38,-511.81 782.76,-512.19 903.19,-512.19 926,-535 1210.51,-535 1234.04,-511.47 1265.96,-511.47 1304.49,-550 P15.5@1350,-550
  Bottom Layer w6: v1(646,-61) 646.19,-61.19 646.19,-176.35 ; v1(683.24,-154.62) 681.62,-153 669.54,-153 646.19,-176.35 ; v1(737,-58) 713,-34 713,167 788,242 860,242 922,304 922,417 981,476 996,476 v1(1020,500) 1022,502 1022,596 1023.81,597.81 1023.81,630.62 1021,633.43 1021,1384 979,1426 906,1426 798.5,1533.5 R15.2@798.5,1648 780,1666.5 Q5.1@780,1710 ; 752,-334 752,-283.56 681.41,-212.97 681.41,-211.41 664.01,-211.41 646.19,-193.59 646.19,-176.35
  Bottom Layer w8: IC1.50@649.45,-513.78 651.57,-511.65 v1(740,-511.65) 740,-478 784,-434 784,-371.38 752,-339.38 752,-334
TIM2_CH2/SPI1_SCK_RMP: IC1.55 P15.11 | length 810.8
  Top Layer w6: v1(760,-410) 765,-405 994,-405 1004,-415 1160,-415 1211.47,-363.53 1211.47,-323.53 1235,-300 1300,-300 P15.11@1350,-250
  Bottom Layer w6: IC1.55@649.45,-415.35 764.65,-415.35 765,-415 v1(760,-410)
USB_D+: IC1.45 IC15.2 J5.3 | length 2379
  Top Layer w6: IC15.2@-305.43,-1911.76 -305.43,-1877.43 v1(-286,-1858) ; v1(-2,-993) 26,-965 345,-965 365,-945 760,-945 765,-950 764,-951 v1(760,-951)
  Bottom Layer w6: v1(-286,-1858) -282,-1858 -270,-1846 ; J5.3@-270,-1786.28 -270,-1846 ; v1(-2,-993) -3,-992 -3,-991 -12,-1000 -12,-1079 -32,-1099 -32,-1139 -74.77,-1181.77 -74.77,-1337.34 -89.81,-1352.38 -89.81,-1369.62 -82.81,-1376.62 -82.81,-1428.59 -82.56,-1428.84 -82.56,-1528.62 -74.77,-1536.41 -74.77,-1637.74 -83,-1645.97 -83,-1646.28 -155.17,-1718.45 -155.17,-1835.12 -176.05,-1856 -213.57,-1856 -230.38,-1872.81 -247.62,-1872.81 -270,-1850.43 -270,-1846 ; v1(760,-951) 760,-930 775,-915 775,-771.87 805,-741.87 805,-701.7 779.37,-676.07 IC1.45@779.37,-604.33
USB_D-: IC1.44 IC15.3 J5.2 | length 2534.4
  Top Layer w6: IC15.3@-305.43,-2006.24 -305.43,-1969.43 -298,-1962 -284,-1962 -271,-1949 -271,-1884 v1(-239,-1852) ; v1(-95,-973) -11.43,-973 11.57,-950 340,-950 360,-930 770,-930 v1(790,-950)
  Bottom Layer w6: v1(-239,-1852) -238.5,-1851.5 -238.5,-1835.5 ; J5.2@-238.5,-1786.28 -238.5,-1835.5 ; v1(-95,-973) -114,-992 -114,-1158.67 -110.48,-1162.19 -104.38,-1162.19 -92.19,-1174.38 -92.19,-1337.79 -101.81,-1347.41 -101.81,-1374.59 -94.81,-1381.59 -94.81,-1533.34 -86.77,-1541.38 -86.77,-1632.77 -167.17,-1713.17 -167.17,-1828.17 -183,-1844 -230,-1844 -238.5,-1835.5 ; v1(790,-950) 790,-773.84 820,-743.84 820,-698.35 799.01,-677.36 799.01,-604.37 IC1.44@799.06,-604.33
VBAT: C17.1 IC13.3 IC17.7 IC17.8 J3.1 Q6.3 R11.1 S1.2 | length 3300.6
  Top Layer w6: v1(-676,-1363) -674,-1365 v1(-468,-1365)
  Bottom Layer w6: Q6.3@-894,317 -894,261.94 -866,233.94 -866,214.06 -870.19,209.87 -870.19,187.38 -873.28,184.28 -873.28,168.54 -870.19,165.45 -870.19,100.08 -866.1,95.99 -866.1,-7.29 -867,-8.19 -848.38,-26.81 -848.38,-373.62 -774,-448 -774,-515.81 -788.19,-530 -788.19,-1023.15 -740,-1071.33 -740,-1087.64 -735,-1092.64 -735,-1260 -680,-1315 -680,-1367 v1(-676,-1363) ; S1.2@-357.58,-1658.21 -373.79,-1658.21 -468,-1564 v1(-468,-1365) -468,-1263 -415,-1210 -281.5,-1210 R11.1@-236.5,-1255 ; IC17.7@-256.2,-1313.23 -256.2,-1274.7 R11.1@-236.5,-1255 ; IC17.8@-230.61,-1313.23 -230.61,-1260.89 R11.1@-236.5,-1255
  Bottom Layer w30: IC13.3@-1097,436.5 -1097,374 -1105,366 -1160.1,366 -1175.1,351 J3.1@-990,351 -956,317 Q6.3@-894,317
VSYS: C19.1 C30.1 C32.1 D1.K IC12.6 IC14.1 L2.1 Q2.2 Q6.2 R10.2 R17.2 | length 5726.3
  Top Layer w30: v1(-891,196) -863,224 ; v1(-890,224) -863,224 ; v1(-810,225) -811,224 -831,224 ; v1(-777,285) -778,285 -808,255 -808,247 -831,224 ; v1(481,1487) 530,1487 537.94,1479.06 v1@943.06,1479.06 ; v1(944,1480) v1@943.06,1479.06 ; v1(988,1480) 987.06,1479.06 v1@943.06,1479.06 ; -863,224 -831,224
  Bottom Layer w30: C19.1@-1187.1,-216 -1175.5,-227.6 IC14.1@-1175.5,-307 ; C19.1@-1177.1,-219 -1157,-198.9 -1157,-148 -1146,-137 -1023,-137 -966,-194 ; R17.2@-966,-225.5 -966,-194 ; v1(-890,224) -897.28,216.72 -897.28,158.6 -894.19,155.51 -894.19,90.14 -890.1,86.05 -890.1,2.65 -894.19,-1.44 -894.19,-122.19 -966,-194 ; v1(-810,225) -810,276 Q6.2@-814,280 -778.5,315.5 -745.5,315.5 ; Q2.2@-582,363 -698,363 -745.5,315.5 ; v1(528,1485) 483,1485 v1(481,1487) 481,1582 418,1645 25,1645 -56.19,1726.19 -149.19,1726.19 -221,1798 -836,1798 -901.89,1732.11 -901.89,931.01 C30.1@-1007.9,825 -977.61,794.71 D1.K@-977.61,709 -977.61,593.6 -879.81,495.81 -879.81,450.44 -823.37,394 -787.3,394 -773,379.7 -773,374.25 -758.94,360.19 -753.49,360.19 -745.5,352.2 -745.5,315.5 ; v1(944,1480) 945,1479 1021,1479 1036.99,1494.99 C32.1@1036.99,1584.5 ; C32.1@1028.5,1576 C32.1@1030.15,1577.65 ; IC12.6@1030.15,1823.6 C32.1@1030.15,1577.65 ; L2.1@1036.99,1707 C32.1@1036.99,1584.5 ; C32.1@1030.15,1577.65 C32.1@1036.99,1584.5
VUSB: C18.1 D1.A IC13.4 IC15.4 J5.1 LED1.A Q6.1 R4.2 USB.A | length 4512.6
  Top Layer w6: v1(-943,502) -818,502 v1(-815,505) ; IC15.4@-230.63,-2006.24 -198.24,-2006.24 -182,-1990 -182,-1928.43 -156.67,-1903.1 -156.67,-1768.33 v1(-207,-1718)
  Bottom Layer w6: v1(-815,505) -815,851 LED1.A@-756,910 -754.79,908.79 -659.59,908.79 -640,928.37 -640,1022 USB.A@-756,1138 ; -207.01,-1734 v1(-207,-1718)
  Bottom Layer w20: D1.A@-1178.39,709 -1178.39,569.5 C18.1@-1173,564.1 -1115.6,564.1 IC13.4@-1093.5,542 -1053.5,502 v1(-943,502) -943,480.41 -910.81,448.22 -910.81,437.6 -828.37,355.16 -814,355.16 Q6.1@-814,355 -848,321 -848,242.81 -845,239.81 -845,206.87 -851.19,200.68 -851.19,107.95 -783,39.76 -783,-267.03 -729.84,-320.19 -715.48,-320.19 -687.19,-348.48 -687.19,-412.49 -691.69,-416.99 -691.69,-516.45 -724.5,-549.27 -714.19,-559.58 -714.19,-600.49 -728.81,-615.11 -728.81,-779.42 -494,-1014.23 -494,-1351.67 -495.81,-1353.48 -495.81,-1584.37 -365.18,-1715 -239,-1715 -240.5,-1713.5 -240.5,-1700.5 -207.01,-1734 J5.1@-207.01,-1786.28 ; R4.2@-240.5,-1677 R4.2@-239,-1678.5
pads on no net: CON1. CON1.11b con2. con2.11b con3. con3.11b DISP1.0a DISP1.0b DISP1.0c DISP1.0d DISP1.11 DISP1.12 DISP1.13 DISP1.14 IC2.3 IC3.5 IC3.7 IC3.8 IC3.9 IC3.10 IC3.11 IC3.12 IC3.17 IC3.18 IC3.21 IC3.22 IC3.23 IC3.28 IC3.30 IC3.32 IC3.33 IC3.34 IC3.35 IC3.36 IC3.45 IC11.1 IC16.5 IC16.6 IC16.7 IC16.11 IC16.12 IC22.0 IC22.1 IC22.7 IC22.9 IC22.15 IC22.17 IC22.18 IC22.20 IC22.25 IC22.27 IC22.28 IC22.29 IC22.30 IC22.31 IC22.32 IC22.33 IC22.34 IC22.35 IC22.36 IC22.37 IC22.38 IC22.39 IC22.40 IC22.55 IC22.56 IC22.57 IC22.58 IC22.59 IC22.60 IC29.6 IC29.7 IC29.9 IC29.15 IC29.16 IC29.17 IC29.18 IC29.19 IC29.20 IC29.21 IC29.22 IC29.23 J5.4 X1.3 X1.4
copper on no net: | length 1.4
  Top Layer w10: 1179,-2456 1180,-2455

## Polygon pours and split planes (outlines as drawn)
GSM_PWR on Top Layer "Top Layer-No Net" (solid, remove dead copper, pour order 23): 125,-45 20,-45 20,-15 100,-15 100,0 125,0
GSM_PWR on Top Layer "Top Layer-No Net" (solid, pour order 24): -200.45,-15 -210,-15 -210,-65 -157.5,-65 -157.5,-15 -162.27,-15 -210,-15
GSM_PWR on Top Layer "Top Layer-No Net" (solid, pour order 25): 26.16,260 26.16,230 111.16,230 113.84,230 113.84,260 26.16,260
GSM_PWR on Top Layer "Top Layer-No Net" (solid, pour order 26): 485,465 485,435 545,435 545,465 485,465
GSM_PWR on Top Layer "Top Layer-No Net" (solid, pour order 28): 290,820 290,775 335,775 335,820
GSM_PWR on Top Layer "Top Layer-No Net" (solid, pour order 29): -120,1345 -120,1305 -25,1305 -25,1345
GND on Top Layer "Top Layer-No Net" (solid, remove dead copper, pour order 30): -1048.96,2028.64 1195.13,2028.64 1391.98,847.54 1404.34,771.08 1414.34,501.08 1424.34,171.08 1184.34,171.08 1179.23,171.08 ccw(c1179.23,71.08) 1108.52,141.8 1090.18,123.45 ccw(c1152.55,61.08) 1064.34,61.08 1064.34,32.51 ccw(c1164.34,32.51) 1093.63,-38.2 1094.34,-38.92 1105.05,-49.63 ccw(c1175.76,21.08) 1175.76,-78.92 1194.34,-78.92 1424.34,-78.92 1414.34,-448.92 1394.34,-858.92 1344.34,-1438.92 1254.34,-2098.92 -1105.66,-2098.92 -1115.66,-2068.92 -1165.66,-1708.92 -1185.66,-1538.92 -1205.66,-1358.92 -1215.66,-1258.92 -1235.66,-1028.92 -1245.66,-868.92 -1255.66,-738.92 -1265.66,-568.92 -1275.66,-228.92 -1275.66,-78.92 -1045.66,-78.92 -1027.08,-78.92 ccw(c-1027.08,21.08) -956.37,-49.63 -945.66,-38.92 -944.95,-38.2 ccw(c-1015.66,32.51) -915.66,32.51 -915.66,51.08 -915.66,59.66 ccw(c-1015.66,59.66) -944.95,130.37 -955.66,141.08 -956.37,141.8 ccw(c-1027.08,71.08) -1027.08,171.08 -1065.66,171.08 -1275.66,171.08 -1275.66,421.08 -1265.66,751.08 -1048.96,2028.64
GSM_PWR on Bottom Layer "Top Layer-No Net" (solid, remove dead copper, pour order 9): -12,1289 15,1262 15,677 90,602 287,602 352,667 352,1255 258,1349 127,1349 82,1394 -131,1394 -138.03,1369.41 -138.03,1345 -135,1315 -135,1290
GSM_PWR on Bottom Layer "Top Layer-No Net" (solid, remove dead copper, pour order 10): -210,-60 -210,-5 140,-5 140,-55 -155,-55 -155,-60
GSM_PWR on Bottom Layer "Top Layer-No Net" (solid, pour order 27): 485,465 485,435 545,435 545,465 485,465
GND on Bottom Layer "Top Layer-GND" (solid, remove dead copper, pour order 31): -1046.51,2034.56 1197.58,2034.56 1394.43,853.46 1406.8,777 1416.8,507 1426.8,177 1186.8,177 1181.68,177 ccw(c1181.68,77) 1110.97,147.71 1092.63,129.37 ccw(c1155,67) 1066.8,67 1066.8,38.42 ccw(c1166.8,38.42) 1096.08,-32.29 1096.8,-33 1107.51,-43.71 ccw(c1178.22,27) 1178.22,-73 1196.8,-73 1426.8,-73 1416.8,-443 1396.8,-853 1346.8,-1433 1256.8,-2093 -1103.2,-2093 -1113.2,-2063 -1163.2,-1703 -1183.2,-1533 -1203.2,-1353 -1213.2,-1253 -1233.2,-1023 -1243.2,-863 -1253.2,-733 -1263.2,-563 -1273.2,-223 -1273.2,-73 -1043.2,-73 -1024.63,-73 ccw(c-1024.63,27) -953.92,-43.71 -943.2,-33 -942.49,-32.29 ccw(c-1013.2,38.42) -913.2,38.42 -913.2,57 -913.2,65.58 ccw(c-1013.2,65.58) -942.49,136.29 -953.2,147 -953.92,147.71 ccw(c-1024.63,77) -1024.63,177 -1063.2,177 -1273.2,177 -1273.2,427 -1263.2,757 -1046.51,2034.56

## Keep-outs
Keep-Out Layer:
  the board outline again, w7.87

## Silkscreen, mask and mechanical layers (free items; w line width, h text height)
Top Overlay:
  text "LCD_CONTRAST" at 709,1224 h40
  text "BATT" at -821,229 h40 r90
Mechanical 1:
  the board outline again, w7.87

## Text inside footprints (layer, text, board x,y; h text height)
P15: Top Overlay "2" at 1265,-835 h40; Top Overlay "1" at 1350,-835 h40; Top Overlay "13" at 1275,-120 h40; Top Overlay "14" at 1150,-130 h40